# Altium PCB SiLPA.PcbDoc (part 3 of 10)
Units mm, origin at the board's own origin, x right, y up, seen from the top; angles counter-clockwise.
Board outline 222.36 x 100 mm, 4 copper layers (L1, P2, L3, L4), stack 1.598 mm thick; 583 components, 330 nets, 1692 pads, 1781 vias.
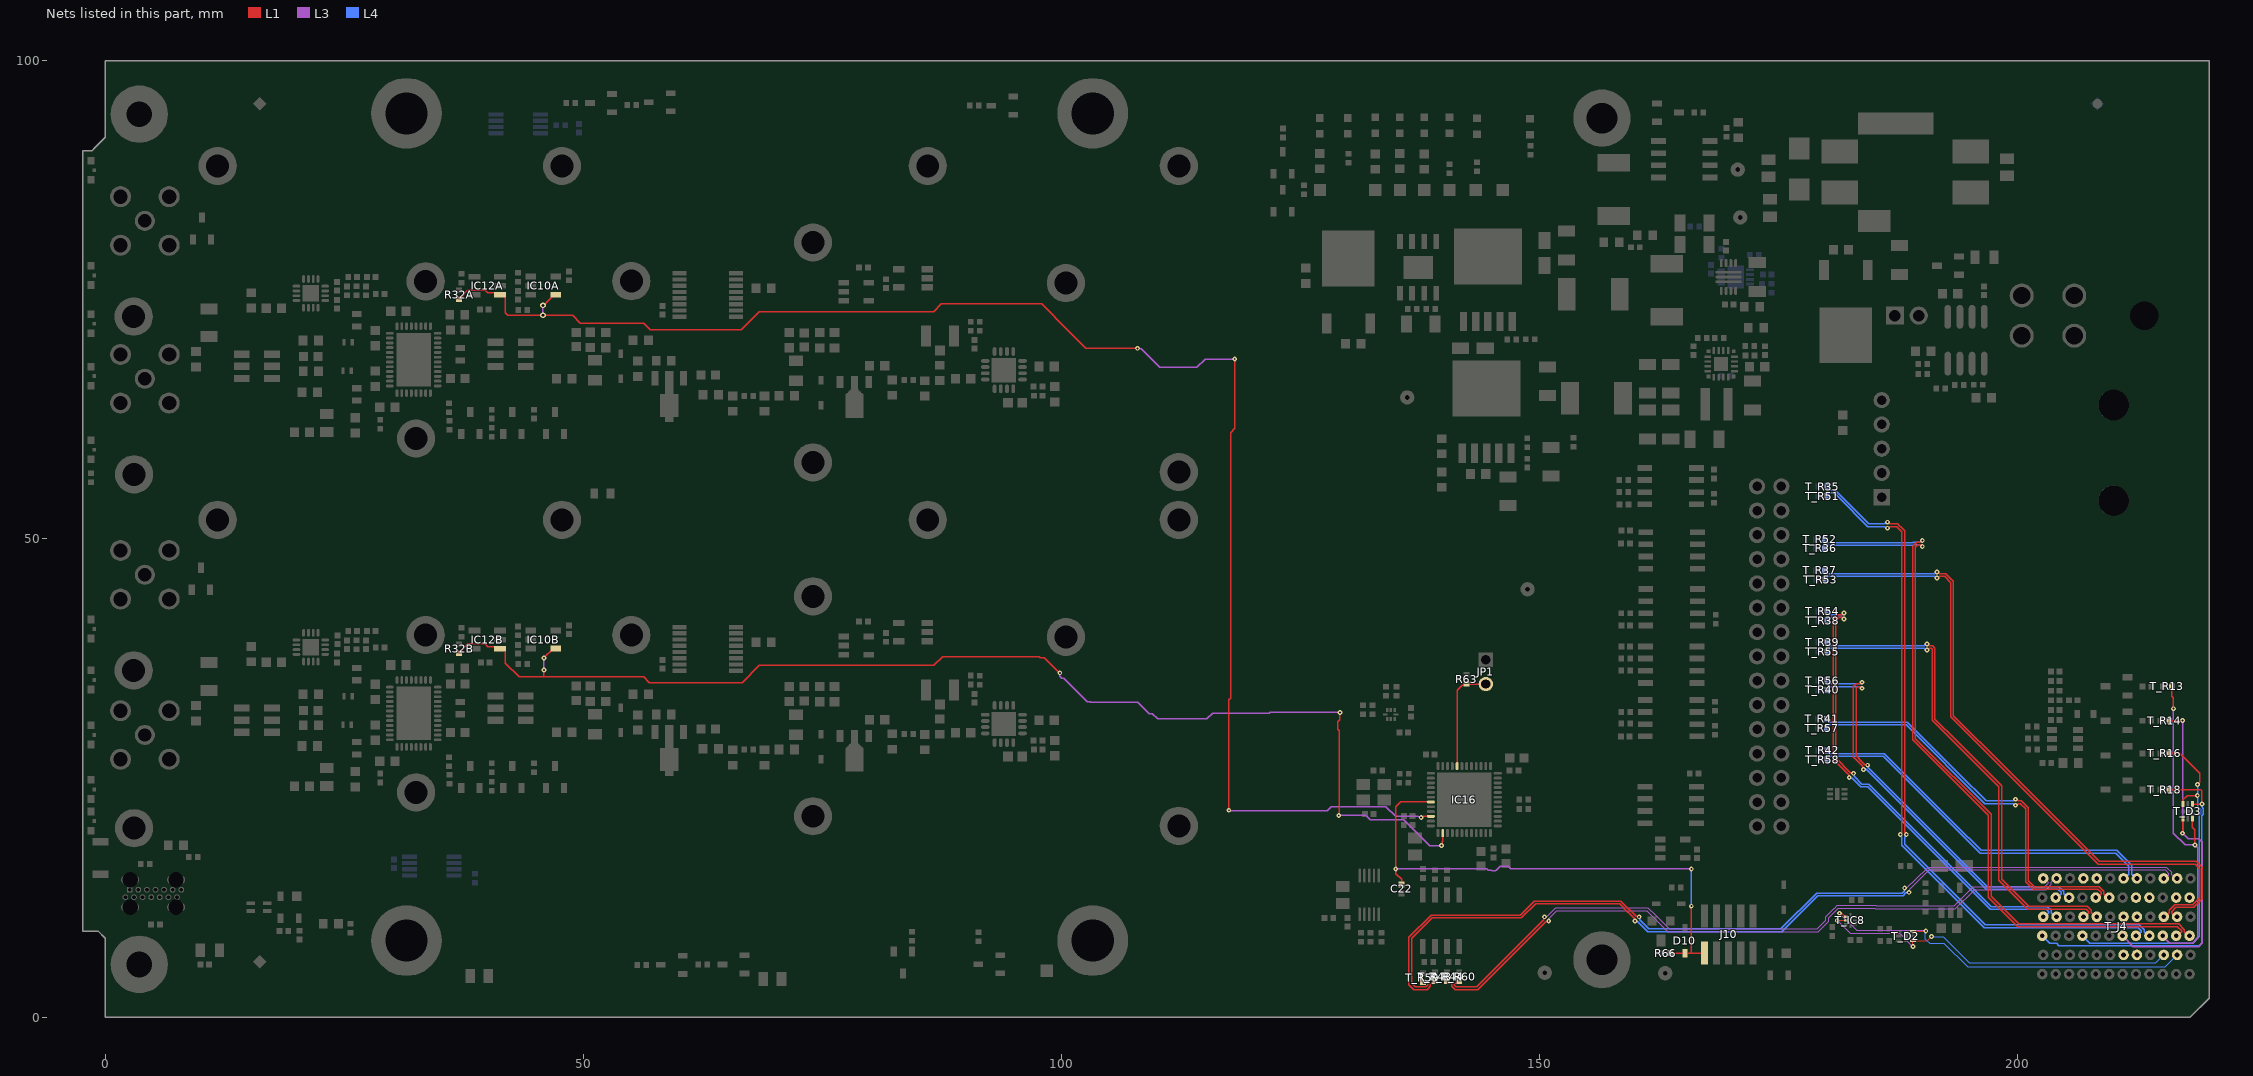
[diagram p5: the nets of this part, all layers, seen from the top]

## Part data (continued)
C18A C18B: library part CC0603_10UF_16V_20%_X5R, "Non-polarised capacitor", Case=0603, MANUFACTURER=GENERIC, Manufacturer1 ComponentHeight=0.8mm, Manufacturer1 Example=MURATA, Manufacturer1 Part Number=GRM188R61C106MA73D, Tolerance=±20%, Voltage=16V, Author="CERN DEM MR", Component Type=Standard, CreateDate=2016-03-02, HelpURL=\\cern.ch\dfs\Applications\Altium\Datasheets\CC0603_X5R_MURATA_GRM.pdf, LatestRevisionDate=2016-03-02, Manufacturer Part Number=CC0603_10UF_16V_20%_X5R, Mounted=Yes, Part Description="SMD Multilayer Chip Ceramic Capacitor", Part Number=CC0603_10UF_16V_20%_X5R, Pin Count=2, Sense=No, SMD=Yes, Socket=No, Status=None, TC=X5R
C20 C22 C72 C74 C76 C78 C79: library part CC0402_100NF_16V_10%_X7R, "Non-polarised capacitor", Case=0402, MANUFACTURER=GENERIC, Manufacturer1 ComponentHeight=0.55mm, Manufacturer1 Example=MURATA, Manufacturer1 Part Number=GRM155R71C104KA88D, Tolerance=±10%, Voltage=16V, Author="CERN DEM JLC", Component Type=Standard, HelpURL=\\cern.ch\dfs\Applications\Altium\Datasheets\CC0402_X7R_MURATA_GRM.pdf, Manufacturer Part Number=CC0402_100NF_16V_10%_X7R, Mounted=Yes, Part Description="SMD Multilayer Chip Ceramic Capacitor", Part Number=CC0402_100NF_16V_10%_X7R, Pin Count=2, Sense=No, SMD=Yes, Socket=No, Status="Not Recommended", TC=X7R
  C20 C22 C72 C76 C78 C79: CreateDate=05/12/2013, LatestRevisionDate=03/12/2007
  C74: CreateDate=05.12.2013, LatestRevisionDate=03.12.2007
C21 C94: library part CC0805_1UF_50V_10%_X7R, "Non-polarised capacitor", Case=0805, MANUFACTURER=GENERIC, Manufacturer1 ComponentHeight=1.1mm, Manufacturer1 Example=KEMET, Manufacturer1 Part Number=C0805C105K5RACTU, Tolerance=±10%, Voltage=50V, Author="CERN DEM JLC", Component Type=Standard, CreateDate=04.12.2013, HelpURL=\\cern.ch\dfs\Applications\Altium\Datasheets\CC0805_X7R_KEMET.pdf, LatestRevisionDate=04.12.2013, Manufacturer Part Number=CC0805_1UF_50V_10%_X7R, Mounted=Yes, Part Description="SMD Multilayer Chip Ceramic Capacitor", Part Number=CC0805_1UF_50V_10%_X7R, Pin Count=2, Sense=No, SMD=Yes, Socket=No, Status=Preferred, TC=X7R
C23 C24 C25 C28 C29 C30 C33 C35 C37 C38 C104 C105 C106 C107 C114: library part CC1206_22UF_35V_20%_JB_TDK_C3216JB1V226M160AC, "Non-polarised capacitor", Case=1206, MANUFACTURER=TDK, Manufacturer Part Number=C3216JB1V226M160AC, Tolerance=±20%, Voltage=35V, Author="CERN DEM JLC", Component Type=Standard, ComponentHeight=1.8mm, CreateDate=13.07.2017, HelpURL=\\cern.ch\dfs\Applications\Altium\Datasheets\CC1206_TDK_C3216JB1V226M160AC.pdf, LatestRevisionDate=13.07.2017, Mounted=Yes, Part Description="SMD Multilayer Chip Ceramic Capacitor", Part Number=CC1206_22UF_35V_20%_JB_TDK_C3216JB1V226M160AC, Pin Count=2, Sense=No, SMD=Yes, Socket=No, Status=None, TC=JB(±10%)
C26 T_C1: library part CC0603_1UF_25V_10%_X7R, "Non-polarised capacitor", Case=0603, MANUFACTURER=GENERIC, Manufacturer1 ComponentHeight=0.9mm, Manufacturer1 Example=MURATA, Manufacturer1 Part Number=GRM188R71E105KA12D, Tolerance=±10%, Voltage=25V, Author="CERN DEM JLC", Component Type=Standard, CreateDate=18.01.2011, HelpURL=\\cern.ch\dfs\Applications\Altium\Datasheets\CC0603_X7R_MURATA.pdf, LatestRevisionDate=18.01.2011, Manufacturer Part Number=CC0603_1UF_25V_10%_X7R, Mounted=Yes, Part Description="SMD Multilayer Chip Ceramic Capacitor", Part Number=CC0603_1UF_25V_10%_X7R, Pin Count=2, Sense=No, SMD=Yes, Socket=No, Status=None, TC=X7R
C27 C31: library part CTE3216-18_10UF_16V_20%_AVX_TCJ, "Polarised capacitor", Case=A, MANUFACTURER=AVX, Manufacturer Part Number=TCJA106M016R0200, Tolerance=±20%, Voltage=16V, Author="CERN DEM JLC", Component Type=Standard, ComponentHeight=1.8mm, CreateDate=29.03.2012, HelpURL=\\cern.ch\dfs\Applications\Altium\Datasheets\CTE_AVX_TCJ.pdf, LatestRevisionDate=29.03.2012, Mounted=Yes, Part Description="ESR 0R200 Tantalum Solid Electrolytic Chip Capacitor with Conductive Polymer Electrode", Part Number=CTE3216-18_10UF_16V_20%_AVX_TCJ, Pin Count=2, Sense=No, SMD=Yes, Socket=No, Status=Preferred
C41A C41B C47A C47B: library part CC0603_0.5PF_50V_WALSIN_HH18N0R5B500CT, "Non-polarised capacitor", Case=0603, MANUFACTURER=GENERIC, Manufacturer1 ComponentHeight=0.9mm, Manufacturer1 Example=WALSIN, Manufacturer1 Part Number=HH18N0R5B500CT, Part Number=CC0603_0.5PF_50V, Tolerance=±20%, Voltage=50V, Component Type=Standard, CreateDate=22.06.2025, LatestRevisionDate=22.06.2025, Manufacturer Part Number=HH18N0R5B500CT, Mounted=Yes, Part Description="SMD Multilayer Chip Ceramic Capacitor", Pin Count=2, Sense=No, SMD=Yes, Socket=No, Status=None, TC=X7R
C42A C42B C45A C45B: library part CC0603_1NF_50V_1%_NP0, "Non-polarised capacitor", Case=0603, MANUFACTURER=GENERIC, Manufacturer1 ComponentHeight=0.9mm, Manufacturer1 Example=AVX, Manufacturer1 Part Number=06035A102FAT2A, Tolerance=±1%, Voltage=50V, Author="CERN DEM JLC", Component Type=Standard, CreateDate=15.06.2017, HelpURL=\\cern.ch\dfs\Applications\Altium\Datasheets\CC0603_C0G_AVX.pdf, LatestRevisionDate=15.06.2017, Manufacturer Part Number=CC0603_1NF_50V_1%_NP0, Mounted=Yes, Part Description="SMD Multilayer Chip Ceramic Capacitor", Part Number=CC0603_1NF_50V_1%_NP0, Pin Count=2, Sense=No, SMD=Yes, Socket=No, Status=None, TC=C0G/NP0
C48A C48B C49A C49B C93: library part CC0603_10NF_50V_10%_X7R, "Non-polarised capacitor", Case=0603, MANUFACTURER=GENERIC, Manufacturer1 ComponentHeight=0.87mm, Manufacturer1 Example=PHYCOMP, Manufacturer1 Part Number=223858615636, Tolerance=±10%, Voltage=50V, Author="CERN DEM JLC", Component Type=Standard, CreateDate=03.12.2007, HelpURL=\\cern.ch\dfs\Applications\Altium\Datasheets\CC0603_X7R_PHYCOMP.pdf, LatestRevisionDate=03.12.2007, Manufacturer Part Number=CC0603_10NF_50V_10%_X7R, Mounted=Yes, Part Description="SMD Multilayer Chip Ceramic Capacitor", Part Number=CC0603_10NF_50V_10%_X7R, Pin Count=2, Sense=No, SMD=Yes, Socket=No, Status=Preferred, TC=X7R
C53A C53B: library part CC0402_10NF_25V_10%_X7R, "Non-polarised capacitor", Case=0402, MANUFACTURER=GENERIC, Manufacturer1 ComponentHeight=0.55mm, Manufacturer1 Example=TDK, Manufacturer1 Part Number=C1005X7R1E103KT, Tolerance=±10%, Voltage=25V, Author="CERN DEM JLC", Component Type=Standard, CreateDate=25.10.2012, HelpURL=\\cern.ch\dfs\Applications\Altium\Datasheets\CC0402_X7R_TDK_C.pdf, LatestRevisionDate=25.10.2012, Manufacturer Part Number=CC0402_10NF_25V_10%_X7R, Mounted=Yes, Part Description="SMD Multilayer Chip Ceramic Capacitor", Part Number=CC0402_10NF_25V_10%_X7R, Pin Count=2, Sense=No, SMD=Yes, Socket=No, Status=Preferred, TC=X7R
C54A C54B: library part CC0402_1NF_50V_10%_X7R, "Non-polarised capacitor", Case=0402, MANUFACTURER=GENERIC, Manufacturer1 ComponentHeight=0.55mm, Manufacturer1 Example=PHYCOMP, Manufacturer1 Part Number=223858715623, Tolerance=±10%, Voltage=50V, Author="CERN DEM JLC", Component Type=Standard, CreateDate=03.12.2007, HelpURL=\\cern.ch\dfs\Applications\Altium\Datasheets\CC0402_X7R_PHYCOMP.pdf, LatestRevisionDate=03.12.2007, Manufacturer Part Number=CC0402_1NF_50V_10%_X7R, Mounted=Yes, Part Description="SMD Multilayer Chip Ceramic Capacitor", Part Number=CC0402_1NF_50V_10%_X7R, Pin Count=2, Sense=No, SMD=Yes, Socket=No, Status="Not Recommended", TC=X7R
C55A C55B C60A C60B T_C3 T_C4 T_C5 T_C8 T_C14 T_C15 T_C20 T_C21: library part CC0402_100NF_50V_10%_X7R, "Non-polarised capacitor", Case=0402, MANUFACTURER=GENERIC, Manufacturer1 ComponentHeight=0.55mm, Manufacturer1 Example=MURATA, Manufacturer1 Part Number=GRM155R71H104KE14D, Tolerance=±10%, Voltage=50V, Author="CERN DEM MR", Component Type=Standard, HelpURL=\\cern.ch\dfs\Applications\Altium\Datasheets\CC0402_MURATA_GRM155R71H104KE14D.pdf, Manufacturer Part Number=CC0402_100NF_50V_10%_X7R, Mounted=Yes, Part Description="SMD Multilayer Chip Ceramic Capacitor", Part Number=CC0402_100NF_50V_10%_X7R, Pin Count=2, Sense=No, SMD=Yes, Socket=No, Status=None, TC=X7R
  C55A C55B C60A C60B: CreateDate=30/06/2017, LatestRevisionDate=30/06/2017
  T_C3 T_C4 T_C5 T_C8 T_C14 T_C15 T_C20 T_C21: CreateDate=30.06.2017, LatestRevisionDate=30.06.2017
C65 C71: library part CC0402_6.8PF_50V_0.5PF_C0G, "Non-polarised capacitor", Case=0402, MANUFACTURER=GENERIC, Manufacturer1 ComponentHeight=0.55mm, Manufacturer1 Example=KEMET, Manufacturer1 Part Number=C0402C689D5GACTU, Tolerance=±0.5pF, Voltage=50V, Author="CERN DEM JLC", Component Type=Standard, CreateDate=03.12.2007, HelpURL="\\cern.ch\dfs\Applications\Altium\Datasheets\CC0402_C0G_KEMET_(Commercial Grade).pdf", LatestRevisionDate=22.04.2015, Manufacturer Part Number=CC0402_6.8PF_50V_0.5PF_C0G, Mounted=Yes, Part Description="SMD Multilayer Chip Ceramic Capacitor", Part Number=CC0402_6.8PF_50V_0.5PF_C0G, Pin Count=2, Sense=No, SMD=Yes, Socket=No, Status=Preferred, TC=C0G/NP0
C68 C69 C97 C98 C108 C112 C113: library part CC0603_1UF_16V_10%_X7R, "Non-polarised capacitor", Case=0603, MANUFACTURER=GENERIC, Manufacturer1 ComponentHeight=0.9mm, Manufacturer1 Example="YAGEO PHYCOMP", Manufacturer1 Part Number=223878615663, Manufacturer Part Number=CC0603_1uF_16V_10%_X7R, Tolerance=±10%, Voltage=16V, Author="CERN DEM JLC", Component Type=Standard, CreateDate=03.12.2007, HelpURL=\\cern.ch\dfs\Applications\Altium\Datasheets\CC0603_X7R_PHYCOMP.pdf, LatestRevisionDate=17.04.2015, Mounted=Yes, Part Description="SMD Multilayer Chip Ceramic Capacitor", Part Number=CC0603_1UF_16V_10%_X7R, Pin Count=2, Sense=No, SMD=Yes, Socket=No, Status=None, TC=X7R
C73 C75 C80: library part CC0603_2.2UF_10V_20%_X7R, "Non-polarised capacitor", Case=0603, MANUFACTURER=GENERIC, Manufacturer1 ComponentHeight=0.9mm, Manufacturer1 Example="TAIYO YUDEN", Manufacturer1 Part Number=LMK107B7225MA-T, Tolerance=±20%, Voltage=10V, Author="CERN DEM JLC", Component Type=Standard, CreateDate=22.06.2011, HelpURL=\\cern.ch\dfs\Applications\Altium\Datasheets\CC0603_X7R_TAIYO-YUDEN_HIGH-VALUE.pdf, LatestRevisionDate=27.06.2011, Manufacturer Part Number=CC0603_2.2UF_10V_20%_X7R, Mounted=Yes, Part Description="SMD Multilayer Chip Ceramic Capacitor", Part Number=CC0603_2.2UF_10V_20%_X7R, Pin Count=2, Sense=No, SMD=Yes, Socket=No, Status="Not Recommended", TC=X7R
C96: library part CC0402_2.2UF_16V_10%_X5R, "Non-polarised capacitor", Case=0402, MANUFACTURER=GENERIC, Manufacturer1 ComponentHeight=0.55mm, Manufacturer1 Example=TDK, Manufacturer1 Part Number=C1005X5R1C225K050, Tolerance=±10%, Voltage=16V, Author="CERN DEM BC", Component Type=Standard, CreateDate=08.02.2021, HelpURL=\\cern.ch\dfs\Applications\Altium\Datasheets\CC0402_X5R_TDK_C.pdf, LatestRevisionDate=08.02.2021, Manufacturer Part Number=CC0402_2.2UF_16V_10%_X5R, Mounted=Yes, Part Description="SMD Multilayer Chip Ceramic Capacitor", Part Number=CC0402_2.2UF_16V_10%_X5R, Pin Count=2, Sense=No, SMD=Yes, Socket=No, Status=Preferred, TC=X5R
C99: library part CC0402_1UF_16V_10%_X5R, "Non-polarised capacitor", Case=0402, MANUFACTURER=GENERIC, Manufacturer1 ComponentHeight=0.55mm, Manufacturer1 Example=TDK, Manufacturer1 Part Number=C1005X5R1C105KT, Tolerance=±10%, Voltage=16V, Author="CERN DEM JLC", Component Type=Standard, CreateDate=2012-10-25, HelpURL=\\cern.ch\dfs\Applications\Altium\Datasheets\CC0402_X5R_TDK_C.pdf, LatestRevisionDate=2012-10-25, Manufacturer Part Number=CC0402_1UF_16V_10%_X5R, Mounted=Yes, Part Description="SMD Multilayer Chip Ceramic Capacitor", Part Number=CC0402_1UF_16V_10%_X5R, Pin Count=2, Sense=No, SMD=Yes, Socket=No, Status=Preferred, TC=X5R
C110: library part CC0402_NO-VALUE, "Non-polarised capacitor", Case=0402, Manufacturer1 ComponentHeight=0.55mm, Author="CERN DEM JLC", Component Type=Standard, CreateDate=14.01.2014, HelpURL=Undefined, LatestRevisionDate=14.01.2014, MANUFACTURER=Undefined, Manufacturer Part Number=CC0402_NO-VALUE, Mounted=No, Part Description="Reserved Footprint For 0402(1005) Chip Ceramic Capacitor", Part Number=CC0402_NO-VALUE, Pin Count=2, Sense=No, SMD=Yes, Socket=No, Status=None
C111: library part CC0402_220PF_50V_1%_C0G, "Non-polarised capacitor", Case=0402, MANUFACTURER=GENERIC, Manufacturer1 ComponentHeight=0.55mm, Manufacturer1 Example=KEMET, Manufacturer1 Part Number=C0402C221F5GAC, Tolerance=±1%, Voltage=50V, Author="CERN DEM BC", Component Type=Standard, CreateDate=14.07.2020, HelpURL="\\cern.ch\dfs\Applications\Altium\Datasheets\CC0402_C0G_KEMET_(Commercial Grade).pdf", LatestRevisionDate=14.07.2020, Manufacturer Part Number=CC0402_220PF_50V_1%_C0G, Mounted=Yes, Part Description="SMD Multilayer Chip Ceramic Capacitor", Part Number=CC0402_220PF_50V_1%_C0G, Pin Count=2, Sense=No, SMD=Yes, Socket=No, Status=Preferred, TC=C0G/NP0
D1A D1B: library part D_TVS_SZNUP1301ML3T1G, "Low Capacitance Diode Array for ESD Protection in a Single Data Line", Case=SOT23, MANUFACTURER=ONSEMI, Power=215mA, Voltage=70V, Author=GK, Bonding=No, Component Type=Standard, ComponentHeight=1.1mm, CreateDate=18.01.2010, Device=SZNUP1301ML3T1G, HelpURL=\\cern.ch\dfs\Applications\Altium\Datasheets\BAR66.pdf, LatestRevisionDate=05.10.2010, Manufacturer Part Number=SZNUP1301ML3T1G, Mounted=Yes, PackageDescription="SOT23 3-Leads, Pitch 0.95mm - Body 1.3x2.9mm, IPC Medium Density", Part Description="Low Capacitance Diode Array for ESD Protection in a Single Data Line", Part Number=SZNUP1301ML3T1G, Pin Count=3, PressFit=No, Sense=No, SMD=Yes, Socket=No
D2A D2B D3A D3B: library part D_TVS_AQ4021-01FTG-C, "6V Bi-directional,ESD Protection for Transient Voltage Suppressor Diode", Case=SOD323, MANUFACTURER=Littlefuse, Power=450W, Voltage=6V, Author=GK, Bonding=No, Component Type=Standard, ComponentHeight=1.14mm, CreateDate=22.07.2015, Device=AQ4021-01FTG-C, HelpURL=\\cern.ch\dfs\Applications\Altium\Datasheets\CDSOD323-T12C-DSL.pdf, LatestRevisionDate=19.12.2017, Manufacturer Part Number=AQ4021-01FTG-C, Mounted=Yes, PackageDescription="SOD-323 Diode; 1.75mm W X 1.30mm L X 1.14mm H Body, IPC Medium Density", Part Description="Bi-directional ESD Protection for Transient Voltage Suppressor Diode", Part Number=AQ4021-01FTG-C, Pin Count=2, PressFit=No, Sense=No, SMD=Yes, Socket=No
D9 D13: "Ultra Low Capacitance Double Rail-to-Rail ESD Protection Diode", Case=SOT143B, MANUFACTURER="NXP SEMICONDUCTORS", Voltage=5.5V, Author="CERN DEM JLC", Bonding=No, Component Type=Standard, ComponentHeight=1.1mm, CreateDate=22.03.2011, Device=PRTR5V0U2X, HelpURL=\\cern.ch\dfs\Applications\Altium\Datasheets\PRTR5V0U2X.pdf, LatestRevisionDate=22.03.2011, Manufacturer Part Number=PRTR5V0U2X, Mounted=Yes, PackageDescription="SOT143B, SOT, 1.90mm Pitch; 4 Pin, 1.30mm W X 2.90mm L X 1.10mm H body, IPC Medium Density", Part Description="Ultra Low Capacitance (1pF) Double Rail-to-Rail ESD Protection Diode (8kV)", Part Number=PRTR5V0U2X, Pin Count=4, PressFit=No, Sense=No, SMD=Yes, Socket=No
D10 D12 D17: "Schottky Diode", Case=SOD323, MANUFACTURER=INFINEON, Power=750mA, Voltage=40V, Author="CERN DEM JLC", Bonding=No, Component Type=Standard, ComponentHeight=1.1mm, CreateDate=12.11.2014, Device=BAT165, HelpURL=\\cern.ch\dfs\Applications\Altium\Datasheets\BAT165.pdf, LatestRevisionDate=12.11.2014, Manufacturer Part Number=BAT165, Mounted=Yes, PackageDescription="Small Outline Diode Flat Lead (SOD-323), 1.70mm W X 1.25mm L X 1.10mm H body,  IPC Medium Density", Part Description="Medium Power AF Schottky Diode", Part Number=BAT165, Pin Count=2, PressFit=No, Sense=No, SMD=Yes, Socket=No
FB1 FB2A FB2B FB3 FB4: library part IND0402_MURATA_BLM15HB221SN1, Case=0402, MANUFACTURER=MURATA, Manufacturer Part Number=BLM15HB221SN1, Power=250mA, Resistance=1R, Tolerance=±25%, Author="CERN DEM JLC", Component Type=Standard, ComponentHeight=0.55mm, CreateDate=23.06.2009, HelpURL=\\cern.ch\dfs\Applications\Altium\Datasheets\IND0402_MURATA_BLM15H.pdf, LatestRevisionDate=25.10.2018, Mounted=Yes, Part Description="SMD EMIFIL Suppression Chip Ferrite Bead", Part Number=IND0402_MURATA_BLM15HB221SN1, Pin Count=2, Sense=No, SMD=Yes, Socket=No, Status=None
FTG1 FTG4: library part FIDUCIAL_TARGET_C100-200, "Fiducial Target", Author="CERN DEM JLC", Component Type="Standard (No BOM)", ComponentHeight=0mm, CreateDate=09.02.2010, Family=Fiducial, HelpURL=Undefined, LatestRevisionDate=04.04.2012, Mounted=No, PackageDescription="Round Fiducial Target, Top Layer, 1.0mm, Top Solder 2.0mm, Keepout =2.0mm", Part Description="Round Fiducial Target, Top Layer, 1.0mm, Top Solder 2.0mm, Keepout =2.0mm", Part Number=FIDUCIAL_TARGET_C100-200, Pin Count=1, Sense=No, SMD=Yes, Socket=No, Status=None
FTG2 FTG3 FTG5 FTG6: library part FIDUCIAL_TARGET_S100-200, "Fiducial Target", Author="CERN DEM JLC", Component Type="Standard (No BOM)", ComponentHeight=0mm, CreateDate=09.02.2010, Family=Fiducial, HelpURL=Undefined, LatestRevisionDate=04.04.2012, Mounted=No, PackageDescription="Square Fiducial Target, Top Layer, 1.0mm, Top Solder 2.0mm, Keepout =2.0mm", Part Description="Square Fiducial Target, Top Layer, 1.0mm, Top Solder 2.0mm, Keepout =2.0mm", Part Number=FIDUCIAL_TARGET_S100-200, Pin Count=1, Sense=No, SMD=Yes, Socket=No, Status=None
IC1A IC1B: "DC-4GHz High Isolation SPDT Non-Reflective Switch", Case=QFN16, MANUFACTURER="ANALOG DEVICES", Author="CERN DEM JLC", Bonding=No, Component Type=Standard, ComponentHeight=1mm, CreateDate=23.02.2017, Device=HMC349ALP4CE, HelpURL=\\cern.ch\dfs\Applications\Altium\Datasheets\HMC349ALP4CE.pdf, LatestRevisionDate=23.02.2017, Manufacturer Part Number=HMC349ALP4CE, Mounted=Yes, PackageDescription="QFN, 0.65mm pitch,square; 4 pin X 4 pin, 4mm X 4mm X 1mm H body (w/thermal tab 2.55 X 2.55mm),  IPC Medium Density", Part Description="DC-4GHz High Isolation SPDT Non-Reflective Switch", Part Number=HMC349ALP4CE, Pin Count=17, PressFit=No, Sense=No, SMD=Yes, Socket=No
IC2A IC2B: "20MHz to 1GHz IF Gain Block", Case=SOT89, MANUFACTURER="ANALOG DEVICES", Author="CERN DEM BC", Bonding=No, Component Type=Standard, ComponentHeight=1.6mm, CreateDate=19.08.2019, Device=ADL5536ARKZ, HelpURL=\\cern.ch\dfs\Applications\Altium\Datasheets\ADL5536ARKZ.pdf, LatestRevisionDate=19.08.2019, Manufacturer Part Number=ADL5536ARKZ, Mounted=Yes, PackageDescription="SOT89, 1.50mm Pitch; 3-Leads, 2.5mm W X 4.5mm L X 1.6mm H body", Part Description="20MHz to 1GHz IF Gain Block", Part Number=ADL5536ARKZ, Pin Count=4, PressFit=No, Sense=No, SMD=Yes, Socket=No
IC3A IC3B: "Monolithic Amplifier", MANUFACTURER=MINI-CIRCUITS, Author="CERN DEM BC", Bonding=No, Component Type=Standard, ComponentHeight=1.6mm, CreateDate=22.08.2019, Device=PHA-1+, HelpURL=\\cern.ch\dfs\Applications\Altium\Datasheets\PHA-1+.pdf, LatestRevisionDate=22.08.2019, Manufacturer Part Number=PHA-1+, Mounted=Yes, PackageDescription="MINI-CIRCUITS DF782 Case, 1.50mm pitch; 4 pin, 2.44mm W X 4.49mm L", Part Description="0.05-6GHz Surface Mount Monolithic Amplifier", Part Number=PHA-1+, Pin Count=4, PressFit=No, Sense=No, SMD=Yes, Socket=No
IC4 IC14: library part IFC_FIN1027A, "3.3V LVDS, 2-Bit, High-Speed, Differential Driver", Case=SOIC8, MANUFACTURER="ON Semiconductor", Author=GK, Bonding=No, Component Type=Standard, ComponentHeight=0.8mm, CreateDate=08/11/2016, Device=FIN1027AMX, HelpURL=\\cern.ch\dfs\Applications\Altium\Datasheets\FIN1101K8X.pdf, LatestRevisionDate=08/11/2016, Manufacturer Part Number=FIN1027AMX, Mounted=Yes, PackageDescription="SOIC 8, Pitch 1.27mm - Body 4x5mm, IPC Medium Density", Part Description="3.3V LVDS, 2-Bit, High-Speed, Differential Driver", Part Number=FIN1027AMX, Pin Count=8, PressFit=No, Sense=No, SMD=Yes, Socket=No
IC5: "3V-17V 2A Step-Down Converter, High Accuracy, With DCS-Control", Case=QFN14, MANUFACTURER="TEXAS INSTRUMENTS", Author="CERN DEM MR", Bonding=No, Component Type=Standard, ComponentHeight=1mm, CreateDate=08.02.2019, Device=TPS62148RGX, HelpURL=\\cern.ch\dfs\Applications\Altium\Datasheets\TPS62148RGX.pdf, LatestRevisionDate=08.02.2019, Manufacturer Part Number=TPS62148RGX, Mounted=Yes, PackageDescription="TEXAS Case Style (R-VQFN-HR-N11), 0.50mm Pitch, 11-pin, 2.00mm W X 3.00mm L X 1.00mm H Body", Part Description="3V-17V 2A Step-Down Converter, High Accuracy, With DCS-Control", Part Number=TPS62148RGX, Pin Count=11, PressFit=No, Sense=No, SMD=Yes, Socket=No
IC6 IC13 IC15 IC21: library part IFC_FIN1028, "3.3V LVDS 2-Bit High-Speed Differential Reciever", Case=SOIC8, MANUFACTURER="ON Semiconductor", Author=GK, Bonding=No, Component Type=Standard, ComponentHeight=0.8mm, CreateDate=08/11/2016, Device=FIN1028MX, HelpURL=\\cern.ch\dfs\Applications\Altium\Datasheets\FIN1101K8X.pdf, LatestRevisionDate=08/11/2016, Manufacturer Part Number=FIN1028MX, Mounted=Yes, PackageDescription="SOIC 8, Pitch 1.27mm - Body 4x5mm, IPC Medium Density", Part Description="3.3V LVDS 2-Bit High-Speed Differential Reciever", Part Number=FIN1028MX, Pin Count=8, PressFit=No, Sense=No, SMD=Yes, Socket=No
IC7A IC7B: "20 dB CATV +12V Power Doubler", Case=QFN40, MANUFACTURER=QORVO, Author="CERN DEM BC", Bonding=No, Component Type=Standard, ComponentHeight=0.8mm, CreateDate=19.04.2021, Device=QPB8808, HelpURL=\\cern.ch\dfs\Applications\Altium\Datasheets\QPB8808.pdf, LatestRevisionDate=19.04.2021, Manufacturer Part Number=QPB8808, Mounted=Yes, PackageDescription="QFN, 0.50mm Pitch, Square; 40 Pin, 5.00mm L X 7.00mm W X 0.80mm H body (w/Thermal Tab 3.60 X 5.60mm), IPC Medium Density", Part Description="20 dB CATV +12V Power Doubler", Part Number=QPB8808, Pin Count=41, PressFit=No, Sense=No, SMD=Yes, Socket=No
IC8 IC35: "Adjustable, 3A, Fast Response LDO Regulator", Case=TO-252-5, MANUFACTURER="MICROCHIP TECHNOLOGY", Author="CERN DEM BC", Bonding=No, Component Type=Standard, ComponentHeight=2.39mm, CreateDate=17.05.2021, Device=MIC29302AWD, HelpURL=\\cern.ch\dfs\Applications\Altium\Datasheets\MIC29302AWD.pdf, LatestRevisionDate=17.05.2021, Manufacturer Part Number=MIC29302AWD, Mounted=Yes, PackageDescription="TO-252 DPAK TO, 1.27mm Pitch; 5 Pin, 10.3mm L X 8.781mm W X 2.39mm H body", Part Description="Adjustable, 3A, Fast Response LDO Regulator", Part Number=MIC29302AWD, Pin Count=6, PressFit=No, Sense=No, SMD=Yes, Socket=No
IC9A IC9B: "DC to 6 GHz, 45 dB TruPwr Detector With Envelope Threshold Detection", Case=QFN16, MANUFACTURER="ANALOG DEVICES", Author="CERN DEM MR", Bonding=No, Component Type=Standard, ComponentHeight=0.8mm, CreateDate=26.09.2017, Device=ADL5904ACPZN-R7, HelpURL=\\cern.ch\dfs\Applications\Altium\Datasheets\ADL5904ACPZN-R7.pdf, LatestRevisionDate=26.09.2017, Manufacturer Part Number=ADL5904ACPZN-R7, Mounted=Yes, PackageDescription="QFN, 0.50mm Pitch, Square; 16 Pin, 3.00mm L X 3.00mm W X 0.80mm H Body (w/Thermal Tab 1.75 X 1.75mm),  IPC Medium Density", Part Description="DC to 6 GHz, 45 dB TruPwr Detector With Envelope Threshold Detection", Part Number=ADL5904ACPZN-R7, Pin Count=17, PressFit=No, Sense=No, SMD=Yes, Socket=No
IC10A IC10B: "Rail-to-Rail, Very Fast, 2.5 V to 5.5 V Single-Supply TTL/CMOS Comparator", Case=SOT23-5, MANUFACTURER="ANALOG DEVICES", Author="CERN DEM JLC", Bonding=No, Component Type=Standard, ComponentHeight=1.45mm, CreateDate=25/04/2012, Device=ADCMP600BRJZ-R2, HelpURL=\\cern.ch\dfs\Applications\Altium\Datasheets\ADCMP600BRJZ-R2.pdf, LatestRevisionDate=25/04/2012, Manufacturer Part Number=ADCMP600BRJZ-R2, Mounted=Yes, PackageDescription="SOT, 0.95mm pitch; 5 pin, 1.60mm W X 2.90mm L X 1.45mm H body, IPC Medium Density", Part Description="Rail-to-Rail, Very Fast, 2.5 V to 5.5 V Single-Supply TTL/CMOS Comparator", Part Number=ADCMP600BRJZ-R2, Pin Count=5, PressFit=No, Sense=No, SMD=Yes, Socket=No
IC11A IC11B: library part 74LVC112APWR, "Dual Negative-Edge-Triggered J-K Flip-Flop With Clear And Preset", Case=TSSOP16, MANUFACTURER="TEXAS INSTRUMENTS", Author="CERN DEM JLC", Bonding=No, Component Type=Standard, ComponentHeight=1.75mm, CreateDate=06.08.2012, Device=SN74LVC112APWR, HelpURL=\\cern.ch\dfs\Applications\Altium\Datasheets\SN74LS112AD.pdf, LatestRevisionDate=06.08.2012, Manufacturer Part Number=SN74LVC112APWR, Mounted=Yes, PackageDescription="SOP, 0.65mm Pitch; 16 Pin, 4.40mm W X 5.00mm L X 1.20mm H Body, IPC Medium Density", Part Description="Dual Negative-Edge-Triggered J-K Flip-Flops With Clear and Preset", Part Number=SN74LVC112APWR, Pin Count=16, PressFit=No, Sense=No, SMD=Yes, Socket=No
IC12A IC12B: "Operational Amplifier", Case=SOT23-5, MANUFACTURER="MICROCHIP TECHNOLOGY", Author="CERN DEM BC", Bonding=No, Component Type=Standard, ComponentHeight=1.45mm, CreateDate=22.08.2019, Device=MCP6291T-E/OT, HelpURL=\\cern.ch\dfs\Applications\Altium\Datasheets\MCP6291T-E-OT.pdf, LatestRevisionDate=22.08.2019, Manufacturer Part Number=MCP6291T-E/OT, Mounted=Yes, PackageDescription="SOT, 0.95mm pitch; 5 pin, 1.55mm W X 2.90mm L X 1.45mm H body, IPC Medium Density", Part Description="1.0mA, 10 MHz Rail-to-Rail Operational Amplifier", Part Number=MCP6291T-E/OT, Pin Count=5, PressFit=No, Sense=No, SMD=Yes, Socket=No
IC16: "Arm? Cortex?-M33 32-bit MCU with FPU, 144 MHz, 593 CoreMark?, up to 512Kbyte dualbank flash memory, 128-Kbyte RAM", Manufacturer_Name=STMicroelectronics, Datasheet Link=https://www.st.com/resource/en/datasheet/stm32c551cc.pdf, Geometry.Height=0.6mm, Manufacturer_Part_Number=STM32C552CEU6
IC17A IC17B: "Logic Gates Single 2 Input A 595-SN74LVC1G08DBVT", Case=SOT-23-5, MANUFACTURER="Texas Instruments", Authors=skuchars, Bonding=No, Component Type=Standard, ComponentHeight="1.15 mm", CreateDate=13.10.2023, Device=SN74LVC1G08DBVR, HelpURL=https://www.ti.com/lit/gpn/sn74lvc1g08, LatestRevisionDate=25.06.2025, Manufacturer Part Number=SN74LVC1G08DBVR, Mounted=Yes, PackageDescription="SOT, 0.95mm Pitch; 5 Pin, 1.60mm W X 2.90mm L X 1.45mm H body, IPC Medium Density", Part Description="Single 2-Input Positive-AND Gate", Part Number=SN74LVC1G08DBVR, Pin Count=5, PressFit=No, Sense=No, SMD=Yes, Socket=No
IC23: library part VMON_STM809, "2.93V  Reset circuit"
IC24A IC24B: "Single 2-Input Positive-OR Gate", Case=SOT23-5, MANUFACTURER="TEXAS INSTRUMENTS", Author="CERN DEM JLC", Bonding=No, Component Type=Standard, ComponentHeight=1.45mm, CreateDate=25.04.2012, Device=SN74LVC1G32DBVR, HelpURL=\\cern.ch\dfs\Applications\Altium\Datasheets\SN74LVC1G32DBVR.pdf, LatestRevisionDate=25.04.2012, Manufacturer Part Number=SN74LVC1G32DBVR, Mounted=Yes, PackageDescription="SOT, 0.95mm Pitch; 5 Pin, 1.60mm W X 2.90mm L X 1.45mm H body, IPC Medium Density", Part Description="Single 2-Input Positive-OR Gate", Part Number=SN74LVC1G32DBVR, Pin Count=5, PressFit=No, Sense=No, SMD=Yes, Socket=No
IC28: "0.9V To 5V, 2A, Very Low Input, Very Low Dropout, Adjustable Regulator With Enable", Case=SOIC8, MANUFACTURER="TEXAS INSTRUMENTS", Author="CERN DEM JLC", Bonding=No, Component Type=Standard, ComponentHeight=1.7mm, CreateDate=17.03.2014, Device=TPS7A7001DDA, HelpURL=\\cern.ch\dfs\Applications\Altium\Datasheets\TPS7A7001DDA.pdf, LatestRevisionDate=17.03.2014, Manufacturer Part Number=TPS7A7001DDA, Mounted=Yes, PackageDescription="SOIC, 1.27mm Pitch; 8 Pin, 3.90mm W X 4.90mm L X 1.70mm H body (w/Thermal Tab 2.40 X 3.10mm), IPC Medium Density", Part Description="0.9V To 5V, 2A, Very Low Input, Very Low Dropout, Adjustable Regulator with Enable", Part Number=TPS7A7001DDA, Pin Count=9, PressFit=No, Sense=No, SMD=Yes, Socket=No
IC29: "Adjustable, 2A, Synchronous Step-Down Regulator with 3.5µA Quiescent Current", Case=SON8, MANUFACTURER="LINEAR TECHNOLOGY", Author="CERN DEM HF", Bonding=No, Component Type=Standard, ComponentHeight=0.8mm, CreateDate=18.05.2022, Device=LTC3624EDD-2, HelpURL=\\cern.ch\dfs\Applications\Altium\Datasheets\LTC3624.pdf, LatestRevisionDate=18.05.2022, Manufacturer Part Number=LTC3624EDD-2, Mounted=Yes, PackageDescription="SON, (DFN) 0.50mm Pitch; 8 Pin, 3.00mm W X 3.00mm L X 0.80mm H body (w/Thermal Tab 1.75 X 2.48mm), IPC Medium Density", Part Description="Adjustable, 2A, Synchronous Step-Down Regulator with 3.5µA Quiescent Current", Part Number=LTC3624EDD-2, Pin Count=9, PressFit=No, Sense=No, SMD=Yes, Socket=No
IC30 IC31: "3-Terminal Regulator 1=GND 2=IN 3=OUT", Case=DPAK, MANUFACTURER="ST MICROELECTRONICS", Author="CERN DEM JLC", Bonding=No, Component Type=Standard, ComponentHeight=2.4mm, CreateDate=08.06.2011, Device=LD1117DT33CTR, HelpURL=\\cern.ch\dfs\Applications\Altium\Datasheets\LD1117DT33CTR.pdf, LatestRevisionDate=08.06.2011, Manufacturer Part Number=LD1117DT33CTR, Mounted=Yes, PackageDescription="TO-252 DPAK TO, 2.28mm Pitch; 2 Pin, 9.725mm L X 6.10mm W X 2.40mm H body, IPC Medium Density", Part Description="3.3V 800mA Low drop fixed and adjustable positive voltage regulators", Part Number=LD1117DT33CTR, Pin Count=3, PressFit=No, Sense=No, SMD=Yes, Socket=No
IC34: "28V, 5A Low IQ Synchronous Step-Up Silent Switcher with PassThru", Case=QFN16, MANUFACTURER="ANALOG DEVICES", Author="CERN DEM HF", Bonding=No, Component Type=Standard, ComponentHeight=1.03mm, CreateDate=07.09.2022, Device=LT8337EV-1, HelpURL=\\cern.ch\dfs\Applications\Altium\Datasheets\LT8337.pdf, LatestRevisionDate=07.09.2022, Manufacturer Part Number=LT8337EV-1, Mounted=Yes, PackageDescription="LQFN, 16-Lead, 0.50mm Pitch; 3.50mm W X 3.50mm L X 0.83mm H body (with 4 Tab 0.375 X0.375mm and with a Thermal Tab 1.43 X1.43mm)# 05-08-1798", Part Description="28V, 5A Low IQ Synchronous Step-Up Silent Switcher with PassThru", Part Number=LT8337EV-1, Pin Count=21, PressFit=No, Sense=No, SMD=Yes, Socket=No
J1: library part CMP-04767-000020-2, "CONN RCPT USB2.0 TYPE C 24POS RA", Current Rating=1.25A, Max Operating Temperature=85°C, Min Operating Temperature=-40°C, Voltage Rating=30V, Contact Material="Gold, Nickel", Gender=Receptacle, Height=9.14mm, NexarPartId=117235448, Number Of Contacts=14, Schedule B=8536695050, USB Standard="USB 2.0"
J2A J2B: library part HIROSE_U.FL-R-SMT-1(10), MANUFACTURER="HIROSE (HRS)", Manufacturer Part Number=U.FL-R-SMT-1(10), Author="CERN DEM JLC", Component Type=Standard, ComponentHeight=1.25mm, CreateDate=24.03.2010, Family=U.FL, HelpURL=\\cern.ch\dfs\Applications\Altium\Datasheets\HIROSE_U.FL-R-SMT-1(10).pdf, LatestRevisionDate=24.03.2010, Mounted=Yes, Part Description="Up to 6GHz Ultra Small Surface Mount Male Coaxial Connectors U.FL Series", Part Number=HIROSE_U.FL-R-SMT-1(10), Pin Count=2, PressFit=No, Sense=No, SMD=Yes, Socket=No, Status=None
J3 J4 J5 J6: library part DELOCK_65848, "50 Ohm Through Hole SMA Right Angle PCB Jack", MANUFACTURER=DELOCK, Manufacturer Part Number="5848 (4043619658480)", Author=GK, Component Type=Standard, ComponentHeight=12.5, CreateDate=13.05.2019, Family=SMA, HelpURL=\\cern.ch\dfs\Applications\Altium\Datasheets\AMPHENOL_132203-16.pdf, LatestRevisionDate=13.05.2019, Mounted=Yes, Part Description="50 Ohm Through Hole SMA Right Angle PCB Jack", Part Number=DELOCK_65848, Pin Count=5, PressFit=No, Sense=No, SMD=No, Socket=No, Status=None
J10: library part "CON_2x10 1.27 SMT_male_HARWIN", "10 Contacts - Pitch 1.27mm - Dual Row SMT Vertical Pin Header (Post Lead = 3mm, Insulator 1mm)", MANUFACTURER=HARWIN, Manufacturer Part Number=M50-3600542, Part Number=HARWIN_M50-3600542, Author=GK, Component Type=Standard, ComponentHeight=5.13mm, CreateDate=15.03.2017, Family="Header 10", HelpURL=\\cern.ch\dfs\Applications\Altium\Datasheets\HARWIN_M50-3600842.pdf, LatestRevisionDate=22.05.2017, Mounted=Yes, Part Description="10 Contacts - Pitch 1.27mm - Dual Row SMT Vertical Pin Header (Post Lead = 3mm, Insulator 1mm)", Pin Count=10, PressFit=No, Sense=No, SMD=Yes, Socket=No, Status=None
J11: library part MOLEX_22-04-1021, "Connector 2 Male", MANUFACTURER=MOLEX, Manufacturer Part Number=22-04-1021, Author="CERN DEM JLC", Component Type=Standard, ComponentHeight=11.7mm, CreateDate=09.02.2012, Family=KK®, HelpURL=\\cern.ch\dfs\Applications\Altium\Datasheets\MOLEX_22-04-1021.pdf, LatestRevisionDate=09.02.2012, Mounted=Yes, Part Description="2.5mm (.100\") Pitch KK® Wire-to-Board Header, Vertical, with Friction Lock, 2 Circuits, Tin (Sn) Plating", Part Number=MOLEX_22-04-1021, Pin Count=2, PressFit=No, Sense=No, SMD=No, Socket=No, Status=None
JP1: library part JUMPER, "Jumper", Supplier Part Number 1=1798942, Supplier 1=Farnell
L1A L1B L2A L2B: library part IND0603_MURATA_BLM18HE102SN1, Case=0603, MANUFACTURER=MURATA, Manufacturer Part Number=BLM18HE102SN1, Power=600mA, Resistance=0.35R, Tolerance=±25%, Author="CERN DEM JLC", Component Type=Standard, ComponentHeight=0.95mm, CreateDate=09.12.2013, HelpURL=\\cern.ch\dfs\Applications\Altium\Datasheets\IND0603_MURATA_BLM18H.pdf, LatestRevisionDate=25.10.2018, Mounted=Yes, Part Description="SMD EMIFIL Suppression Chip Ferrite Bead", Part Number=IND0603_MURATA_BLM18HE102SN1, Pin Count=2, Sense=No, SMD=Yes, Socket=No, Status=None
L3A L3B L4A L4B: library part ADL2012S-1R2M-T01, "1.2uH Unshielded Drum Core, Wirewound Inductor 550 mA 500mOhm Max 0808 (2012 Metric)", Case=0808, MANUFACTURER=TDK, Part Number=810-ADL2012S-1R2MT01, Power=550mA, Resistance=500mΩ, Tolerance="20 %", Authors=skuchars, Component Type=Standard, ComponentHeight=1.75mm, CreateDate=26.06.2025, HelpURL=https://product.tdk.com/system/files/dam/doc/product/inductor/inductor/smd/catalog/inductor_automotive_decoupling_adl2012_en.pdf, LatestRevisionDate=26.06.2025, Manufacturer Part Number=ADL2012S-1R2M-T01, Mounted=Yes, Part Description="Power Inductors - SMD 1.2uH 0.5ohm 20% AEC-Q200", Pin Count=2, Sense=No, SMD=Yes, Socket=No, Status=None
L5A L5B: library part IND0603_TDK_MPZ1608R391A, "Inductor", Case=0603, MANUFACTURER=TDK, Manufacturer Part Number=MPZ1608R391A, Power=1.2A, Resistance=0.12R, Tolerance=±25%, Author="CERN DEM JLC", Component Type=Standard, ComponentHeight=0.95mm, CreateDate=2009-12-02, HelpURL=\\cern.ch\dfs\Applications\Altium\Datasheets\IND0603_TDK_MPZ1608.pdf, LatestRevisionDate=2009-12-02, Mounted=Yes, Part Description="SMT Chip Bead for Power Line", Part Number=IND0603_TDK_MPZ1608R391A, Pin Count=2, Sense=No, SMD=Yes, Socket=No, Status=None
L6 L8 L9 L10: library part IND_1.5UH_20%_TDK_SPM6530, "Inductor With Core", MANUFACTURER=TDK, Manufacturer Part Number=SPM6530T-1R5M100, Power=11A, Resistance=0.0097R, Tolerance=±20%, Author="CERN DEM MR", Component Type=Standard, ComponentHeight=3mm, CreateDate=08.11.2016, HelpURL=\\cern.ch\dfs\Applications\Altium\Datasheets\IND_TDK_SPM6530.pdf, LatestRevisionDate=08.11.2016, Mounted=Yes, Part Description="SMD Inductor for Power Circuits (Wound Metal), SPM Series", Part Number=IND_1.5UH_20%_TDK_SPM6530, Pin Count=2, Sense=No, SMD=Yes, Socket=No, Status=None
L7: library part IND0603_MURATA_BLM18KG121TN1, Case=0603, MANUFACTURER=MURATA, Manufacturer Part Number=BLM18KG121TN1, Power=3A, Resistance=0.03R, Tolerance=±25%, Author="CERN DEM BC", Component Type=Standard, ComponentHeight=0.75mm, CreateDate=14.01.2020, HelpURL=\\cern.ch\dfs\Applications\Altium\Datasheets\IND0603_MURATA_BLM18KG121TN1.pdf, LatestRevisionDate=14.01.2020, Mounted=Yes, Part Description="SMD EMIFIL Chip Ferrite Bead", Part Number=IND0603_MURATA_BLM18KG121TN1, Pin Count=2, Sense=No, SMD=Yes, Socket=No
L11A L11B: library part IND0805_1UH_20%_WURTH_74479775210, "Inductor", Case=0805, MANUFACTURER="WURTH ELEKTRONIK", Manufacturer Part Number=74479775210, Power=800mA, Resistance=0.1R, Tolerance=±20%, Author="CERN DEM JLC", Component Type=Standard, ComponentHeight=1.2mm, CreateDate=10.10.2012, HelpURL=\\cern.ch\dfs\Applications\Altium\Datasheets\IND0805_WURTH_74479775210.pdf, LatestRevisionDate=08.04.2014, Mounted=Yes, Part Description="SMD-Power Inductance (WE-PMI Series)", Part Number=IND0805_1UH_20%_WURTH_74479775210, Pin Count=2, Sense=No, SMD=Yes, Socket=No, Status=None
L12A L12B L15A L15B L18A L18B: library part IND0603_COILCRAFT_AF-681XJRW, "Fixed Inductors 1608 680nH Unshld 5% 490mA 460mOhms", Case=0603, MANUFACTURER=COILCRAFT, Manufacturer Part Number=0603AF-681XJRW, Power=490mA, Resistance=0.46R, Tolerance=5%, Authors=skuchars, ComponentHeight=0.91mm, CreateDate=25.06.2025, HelpURL=https://www.coilcraft.com/getmedia/d1383945-8e89-4315-a3c0-59c445701e7e/0603af.pdf, LatestRevisionDate=25.06.2025, Mounted=Yes, Part Description="RF Inductors - SMD", Part Number=0603AF-681XJRW, Pin Count=2, Sense=No, SMD=Yes, Socket=No
L13A L13B L17A L17B: "LQG15HS_02 Series Inductor 1.5nH +/-0.1nH 0402 (1005)", Case=0402, MANUFACTURER="Murata Electronics", Power=1000mA, Resistance=0.07, Tolerance=±0.1nH, Authors=skuchars, Component Type=Standard, ComponentHeight=0.6mm, CreateDate=26.06.2025, HelpURL=https://search.murata.co.jp/Ceramy/image/img/P02/JELF243B-0010.pdf, LatestRevisionDate=27.06.2025, Manufacturer Part Number=LQG15HS1N5B02D, Mounted=Yes, Part Description="RF Inductors - SMD 1.5nH +-.1nH", Part Number=LQG15HS1N5B02D, Pin Count=2, Sense=No, SMD=Yes, Socket=No, Status=None
L14: library part IND_3.3UH_20%_COILCRAFT_XAL4030, "Inductor With Core", MANUFACTURER=COILCRAFT, Manufacturer Part Number=XAL4030-332ME, Power=5A, Resistance=0.026R, Tolerance=±20%, Author="CERN DEM BC", Component Type=Standard, ComponentHeight=3.1mm, CreateDate=07.08.2019, HelpURL=\\cern.ch\dfs\Applications\Altium\Datasheets\IND_COILCRAFT_XAL4030.pdf, LatestRevisionDate=07.08.2019, Mounted=Yes, Part Description="SMD Shielded Power Inductor", Part Number=IND_3.3UH_20%_COILCRAFT_XAL4030, Pin Count=2, Sense=No, SMD=Yes, Socket=No
L19: library part IND_MURATA_DLW21SN900SQ2L, "Inductor Common Mode", Case=0805, MANUFACTURER=MURATA, Manufacturer Part Number=DLW21SN900SQ2L, Power=330mA, Resistance=0.35R, Tolerance=±25%, Author="CERN DEM JLC", Component Type=Standard, ComponentHeight=1.4mm, CreateDate=01.07.2014, HelpURL=\\cern.ch\dfs\Applications\Altium\Datasheets\IND_MURATA_DLW21S.pdf, LatestRevisionDate=01.07.2014, Mounted=Yes, Part Description="Wire Wound Common Mode Choke Coil (DLW21S Series)", Part Number=IND_MURATA_DLW21SN900SQ2L, Pin Count=4, Sense=No, SMD=Yes, Socket=No, Status=None
LD1 LD2 LD8 LD10: library part LED_AVAGO_HSMC-C120, "LED Red 1C 2A", MANUFACTURER="AVAGO TECHNOLOGIES", Manufacturer Part Number=HSMC-C120, Author="CERN DEM JMW", Bonding=No, Color=Red, Component Type=Standard, ComponentHeight=0.7mm, ComponentLink1Description="Design Guide", ComponentLink1URL=\\cern.ch\dfs\Applications\Altium\Datasheets\LED_AVAGO_HSMC-C120_DESIGN-GUIDE.pdf, CreateDate=22.07.2009, HelpURL=\\cern.ch\dfs\Applications\Altium\Datasheets\LED_AVAGO_HSMC-C120.pdf, LatestRevisionDate=20.06.2012, Mounted=Yes, PackageDescription="Red Chip LED, 2-Leads, Body 1.7x1.1mm, Side Emitting Package", Part Description="High Performance Right Angle Chip Red LED", Part Number=LED_AVAGO_HSMC-C120, Pin Count=2, PressFit=No, Sense=No, SMD=Yes, Socket=No
LD3 LD4 LD5 LD6 LD9 T_LD2: library part LED_AVAGO_HSME-C120, "LED Green 1C 2A", MANUFACTURER="AVAGO TECHNOLOGIES", Manufacturer Part Number=HSME-C120, Author="CERN DEM JMW", Bonding=No, Color=Green, Component Type=Standard, ComponentHeight=0.7mm, ComponentLink1Description="Design Guide", ComponentLink1URL=\\cern.ch\dfs\Applications\Altium\Datasheets\LED_AVAGO_HSME-C110_DESIGN-GUIDE.pdf, CreateDate=22.07.2009, HelpURL=\\cern.ch\dfs\Applications\Altium\Datasheets\LED_AVAGO_HSME-C120.pdf, LatestRevisionDate=20.06.2012, Mounted=Yes, PackageDescription="Green Chip LED, 2-Leads, Body 1.7x1.1mm, Side Emitting Package", Part Description="High Performance Right Angle Chip Green LED", Part Number=LED_AVAGO_HSME-C120, Pin Count=2, PressFit=No, Sense=No, SMD=Yes, Socket=No
LD11 LD12 LD13 LD14 LD16 LD18 T_LD1: library part LED_0603_Green, "Green 0603", MANUFACTURER=KINGBRIGHT, Manufacturer Part Number=KPH-1608CGCK, Part Number=LED_KINGBRIGHT_KPH-1608CGCK, Author="CERN DEM JLC", Bonding=No, Color=Green, Component Type=Standard, ComponentHeight=0.65mm, CreateDate=03.07.2017, HelpURL=\\cern.ch\dfs\Applications\Altium\Datasheets\LED_KINGBRIGHT_KPH-1608CGCK.pdf, LatestRevisionDate=03.07.2017, Mounted=Yes, PackageDescription="SMT Green LED, Case 0603, Body L 1.6 x W 0.8mm H 0.65mm", Part Description="SMD Green LED, Case 1.6mmX0.8mm(0603), 0.65mm Thickness", Pin Count=2, PressFit=No, Sense=No, SMD=Yes, Socket=No
Q1: library part "XTAL_24MHZ_EPSON_TSX-3225 24.0000MF15X-AC", "Crystal 4 pins 1=XTAL Control 2=GND3=XTAL 4=GND", MANUFACTURER=EPSON, Manufacturer Part Number="TSX-3225 24.0000MF15X-AC", Author="CERN DEM JLC", Bonding=No, Component Type=Standard, ComponentHeight=0.6mm, ComponentLink1Description="Ordering Informations", ComponentLink1URL=\\cern.ch\dfs\Applications\Altium\Datasheets\XTAL_EPSON_TSX-3225_Ordering-Informations.pdf, CreateDate=06.10.2016, HelpURL=\\cern.ch\dfs\Applications\Altium\Datasheets\XTAL_EPSON_TSX-3225.pdf, LatestRevisionDate=06.10.2016, Mounted=Yes, PackageDescription="Crystal, Corner Concave; 4 Pin, 2.50mm L X 3.20mm W X 0.60mm H, TSX-3225 Serie", Part Description="Tolerance: ±10ppm, Stability: ±15ppm, -40°C to +85°C, 9pF, Surface Mount Quartz Crystal, TX-3225 Series", Part Number="XTAL_24MHZ_EPSON_TSX-3225 24.0000MF15X-AC", Pin Count=4, PressFit=No, Sense=No, SMD=Yes, Socket=No
R1A R1B R2A R2B R16 R26 R34 R35 R36 R37 R38 R39 R42 R43 R44 R45 R46 R47 R117 R118 R119: library part R0402_100R_1%_0.0625W_100PPM, "Resistor - 1%", Case=0402, MANUFACTURER=GENERIC, Manufacturer1 ComponentHeight=0.4mm, Manufacturer1 Example="YAGEO PHYCOMP", Manufacturer1 Part Number=232270671001L, Power=0.0625W, Tolerance=±1%, Author="CERN DEM JLC", Component Type=Standard, CreateDate=03.12.2007, HelpURL=\\cern.ch\dfs\Applications\Altium\Datasheets\R0402_Phycomp_RC0402.pdf, LatestRevisionDate=17.10.2012, Manufacturer Part Number=R0402_100R_1%_0.0625W_100PPM, Mounted=Yes, Part Description="General Purpose Thick Film Chip Resistor", Part Number=R0402_100R_1%_0.0625W_100PPM, Pin Count=2, PressFit=No, Sense=No, SMD=Yes, Socket=No, Status="Not Recommended", TC=±100ppm/°C
R3A R3B R108 R110: library part R0603_1K_1%_0.1W_100PPM, "Resistor - 1%", Case=0603, MANUFACTURER=GENERIC, Manufacturer1 ComponentHeight=0.55mm, Manufacturer1 Example="NIC COMPONENT", Manufacturer1 Part Number=NRC06F1001TRF, Power=0.1W, Tolerance=±1%, Author="CERN DEM JLC", Component Type=Standard, CreateDate=03.12.2007, HelpURL=\\cern.ch\dfs\Applications\Altium\Datasheets\R0603_NIC_NRC.pdf, LatestRevisionDate=13.03.2008, Manufacturer Part Number=R0603_1K_1%_0.1W_100PPM, Mounted=Yes, Part Description="General Purpose Thick Film Chip Resistor", Part Number=R0603_1K_1%_0.1W_100PPM, Pin Count=2, PressFit=No, Sense=No, SMD=Yes, Socket=No, Status=Preferred, TC=±100ppm/°C
R4A R4B R9A R9B R10A R10B R21A R21B R96 R97: library part R0603_NO-VALUE, "Resistor", Case=0603, Author="CERN DEM JLC", Component Type=Standard, CreateDate=03.12.2007, HelpURL=Undefined, LatestRevisionDate=13.03.2008, MANUFACTURER=Undefined, Manufacturer1 ComponentHeight=Undefined, Manufacturer1 Example=Undefined, Manufacturer1 Part Number=Undefined, Manufacturer Part Number=R0603_NO-VALUE, Mounted=No, Part Description="Reserved Footprint For a 0603 (1608) Chip Resistor", Part Number=R0603_NO-VALUE, Pin Count=2, PressFit=No, Sense=No, SMD=Yes, Socket=No, Status=None
R5A R5B R6A R6B R24A R24B R41 R53 R105 T_R2 T_R4 T_R25 T_R35 T_R36 T_R37 T_R38 T_R39 T_R40 T_R41 T_R42 T_R43 T_R44 T_R51 T_R52 T_R53 T_R54 T_R55 T_R56 T_R57 T_R58 T_R59 T_R60: library part R0402_0R_JUMPER, "Resistor", Case=0402, MANUFACTURER=GENERIC, Manufacturer1 ComponentHeight=0.4mm, Manufacturer1 Example="YAGEO PHYCOMP", Manufacturer1 Part Number=232270591001L, Author="CERN DEM JLC", Component Type=Standard, CreateDate=03.12.2007, HelpURL=\\cern.ch\dfs\Applications\Altium\Datasheets\R0402_Phycomp_RC0402.pdf, LatestRevisionDate=17.10.2012, Manufacturer Part Number=R0402_0R_JUMPER, Mounted=Yes, Part Description="1A (0.05R Max DC Resistance) Zero Ohm Jumper", Part Number=R0402_0R_JUMPER, Pin Count=2, Sense=No, SMD=Yes, Socket=No
  R5A R5B R6A R6B R24A R24B R41 R53 R105 T_R2 T_R4 T_R35 T_R36 T_R37 T_R38 T_R39 T_R40 T_R41 T_R42 T_R43 T_R44 T_R51 T_R52 T_R53 T_R54 T_R55 T_R56 T_R57 T_R58 T_R59 T_R60: PressFit=No, Status="Not Recommended"
  T_R25: Status="Not recommended"
R7A R7B R8A R8B: library part R0603_NO-VALUE, "Resistor", Case=0603, MANUFACTURER=Undefined, Author="CERN DEM JLC", Component Type=Standard, CreateDate=03.12.2007, HelpURL=Undefined, LatestRevisionDate=13.03.2008, Manufacturer1 ComponentHeight=Undefined, Manufacturer1 Example=Undefined, Manufacturer1 Part Number=Undefined, Manufacturer Part Number=R0603_NO-VALUE, Mounted=No, Part Description="Reserved Footprint For a 0603 (1608) Chip Resistor", Part Number=R0603_NO-VALUE, Pin Count=2, PressFit=No, Sense=No, SMD=Yes, Socket=No, Status=None
R11 R12 R13 R14 R15 R55 R64 R74 R84: library part R0402_330R_1%_0.0625W_100PPM, "Resistor - 1%", Case=0402, MANUFACTURER=GENERIC, Manufacturer1 ComponentHeight=0.4mm, Manufacturer1 Example="YAGEO PHYCOMP", Manufacturer1 Part Number=232270673301L, Power=0.0625W, Tolerance=±1%, Author="CERN DEM JLC", Component Type=Standard, CreateDate=03.12.2007, HelpURL=\\cern.ch\dfs\Applications\Altium\Datasheets\R0402_Phycomp_RC0402.pdf, LatestRevisionDate=17.10.2012, Manufacturer Part Number=R0402_330R_1%_0.0625W_100PPM, Mounted=Yes, Part Description="General Purpose Thick Film Chip Resistor", Part Number=R0402_330R_1%_0.0625W_100PPM, Pin Count=2, PressFit=No, Sense=No, SMD=Yes, Socket=No, Status="Not Recommended", TC=±100ppm/°C
R17: library part R0603_47K_1%_0.1W_100PPM, "Resistor - 1%", Case=0603, MANUFACTURER=GENERIC, Manufacturer1 ComponentHeight=0.55mm, Manufacturer1 Example="NIC COMPONENT", Manufacturer1 Part Number=NRC06F4702TRF, Power=0.1W, Tolerance=±1%, Author="CERN DEM JLC", Component Type=Standard, CreateDate=03.12.2007, HelpURL=\\cern.ch\dfs\Applications\Altium\Datasheets\R0603_NIC_NRC.pdf, LatestRevisionDate=13.03.2008, Manufacturer Part Number=R0603_47K_1%_0.1W_100PPM, Mounted=Yes, Part Description="General Purpose Thick Film Chip Resistor", Part Number=R0603_47K_1%_0.1W_100PPM, Pin Count=2, Sense=No, SMD=Yes, Socket=No, Status=Preferred, TC=±100ppm/°C
R18A R18B: library part R0603_910R_1%_0.1W_100PPM, "Resistor - 1%", Case=0603, MANUFACTURER=GENERIC, Manufacturer1 ComponentHeight=0.55mm, Manufacturer1 Example="NIC COMPONENT", Manufacturer1 Part Number=NRC06F9100TRF, Power=0.1W, Tolerance=±1%, Author="CERN DEM JLC", Component Type=Standard, CreateDate=03.12.2007, HelpURL=\\cern.ch\dfs\Applications\Altium\Datasheets\R0603_NIC_NRC.pdf, LatestRevisionDate=13.03.2008, Manufacturer Part Number=R0603_910R_1%_0.1W_100PPM, Mounted=Yes, Part Description="General Purpose Thick Film Chip Resistor", Part Number=R0603_910R_1%_0.1W_100PPM, Pin Count=2, PressFit=No, Sense=No, SMD=Yes, Socket=No, Status=Preferred, TC=±100ppm/°C
R19A R19B R68: library part R0402_18K_1%_0.0625W_100PPM, "Resistor - 1%", Case=0402, MANUFACTURER=GENERIC, Manufacturer1 ComponentHeight=0.4mm, Manufacturer1 Example="YAGEO PHYCOMP", Manufacturer1 Part Number=232270671803L, Power=0.0625W, Tolerance=±1%, Author="CERN DEM JLC", Component Type=Standard, CreateDate=03.12.2007, HelpURL=\\cern.ch\dfs\Applications\Altium\Datasheets\R0402_Phycomp_RC0402.pdf, LatestRevisionDate=17.10.2012, Manufacturer Part Number=R0402_18K_1%_0.0625W_100PPM, Mounted=Yes, Part Description="General Purpose Thick Film Chip Resistor", Part Number=R0402_18K_1%_0.0625W_100PPM, Pin Count=2, PressFit=No, Sense=No, SMD=Yes, Socket=No, Status="Not Recommended", TC=±100ppm/°C
R20 R62A R62B R63 R66 R70 R71A R71B R72 R92 R93 R107 R109 R120 R218 T_R7 T_R31 T_R32 T_R33 T_R34 T_R67 T_R68 T_R69: library part R0402_10K_1%_0.0625W_100PPM, "Resistor - 1%", Case=0402, MANUFACTURER=GENERIC, Manufacturer1 ComponentHeight=0.4mm, Manufacturer1 Example="YAGEO PHYCOMP", Manufacturer1 Part Number=232270671003L, Power=0.0625W, Tolerance=±1%, Author="CERN DEM JLC", Component Type=Standard, HelpURL=\\cern.ch\dfs\Applications\Altium\Datasheets\R0402_Phycomp_RC0402.pdf, Manufacturer Part Number=R0402_10K_1%_0.0625W_100PPM, Mounted=Yes, Part Description="General Purpose Thick Film Chip Resistor", Part Number=R0402_10K_1%_0.0625W_100PPM, Pin Count=2, SMD=Yes, Socket=No, TC=±100ppm/°C
  R20 R62A R62B R63 R66 R71A R71B R92 R93 R109 R120: CreateDate=2007-12-03, LatestRevisionDate=2012-10-17, Status="Not recommended", Table="Resistors SMD"
  R70 T_R7 T_R31 T_R32 T_R33 T_R34 T_R67 T_R68 T_R69: CreateDate=03.12.2007, LatestRevisionDate=17.10.2012, PressFit=No, Sense=No, Status="Not Recommended"
  R72: CreateDate=2007-12-03, LatestRevisionDate=2012-10-17, Sense=No, Status="Not recommended"
  R107 R218: CreateDate=03.12.2007, LatestRevisionDate=17.10.2012, Sense=No, Status="Not recommended"
R22 R32A R32B R61: library part R0402_10k_1%_0.0625W_100PPM, "Resistor - 1%", Case=0402, MANUFACTURER=GENERIC, Manufacturer1 ComponentHeight=0.4mm, Manufacturer1 Example="YAGEO PHYCOMP", Manufacturer1 Part Number=232270671003L, Manufacturer Part Number=R0402_10K_1%_0.0625W_100PPM, Power=0.0625W, Tolerance=±1%, Author="CERN DEM JLC", Component Type=Standard, CreateDate=03.12.2007, HelpURL=\\cern.ch\dfs\Applications\Altium\Datasheets\R0402_Phycomp_RC0402.pdf, LatestRevisionDate=17.10.2012, Mounted=Yes, Part Description="General Purpose Thick Film Chip Resistor", Part Number=R0402_10K_1%_0.0625W_100PPM, Pin Count=2, PressFit=No, Sense=No, SMD=Yes, Socket=No, Status="Not Recommended", TC=±100ppm/°C
R23A R23B: library part R0402_1K_1%_0.0625W_100PPM, "Resistor - 1%", Case=0402, MANUFACTURER=GENERIC, Manufacturer1 ComponentHeight=0.4mm, Manufacturer1 Example="YAGEO PHYCOMP", Manufacturer1 Part Number=232270671002L, Power=0.0625W, Tolerance=±1%, Author="CERN DEM JLC", Component Type=Standard, CreateDate=03.12.2007, HelpURL=\\cern.ch\dfs\Applications\Altium\Datasheets\R0402_Phycomp_RC0402.pdf, LatestRevisionDate=17.10.2012, Manufacturer Part Number=R0402_1K_1%_0.0625W_100PPM, Mounted=Yes, Part Description="General Purpose Thick Film Chip Resistor", Part Number=R0402_1K_1%_0.0625W_100PPM, Pin Count=2, PressFit=No, Sense=No, SMD=Yes, Socket=No, Status="Not Recommended", TC=±100ppm/°C